# EAGLE board SAME70-XPLD (EAGLE 9.2.2), part 1 of 8
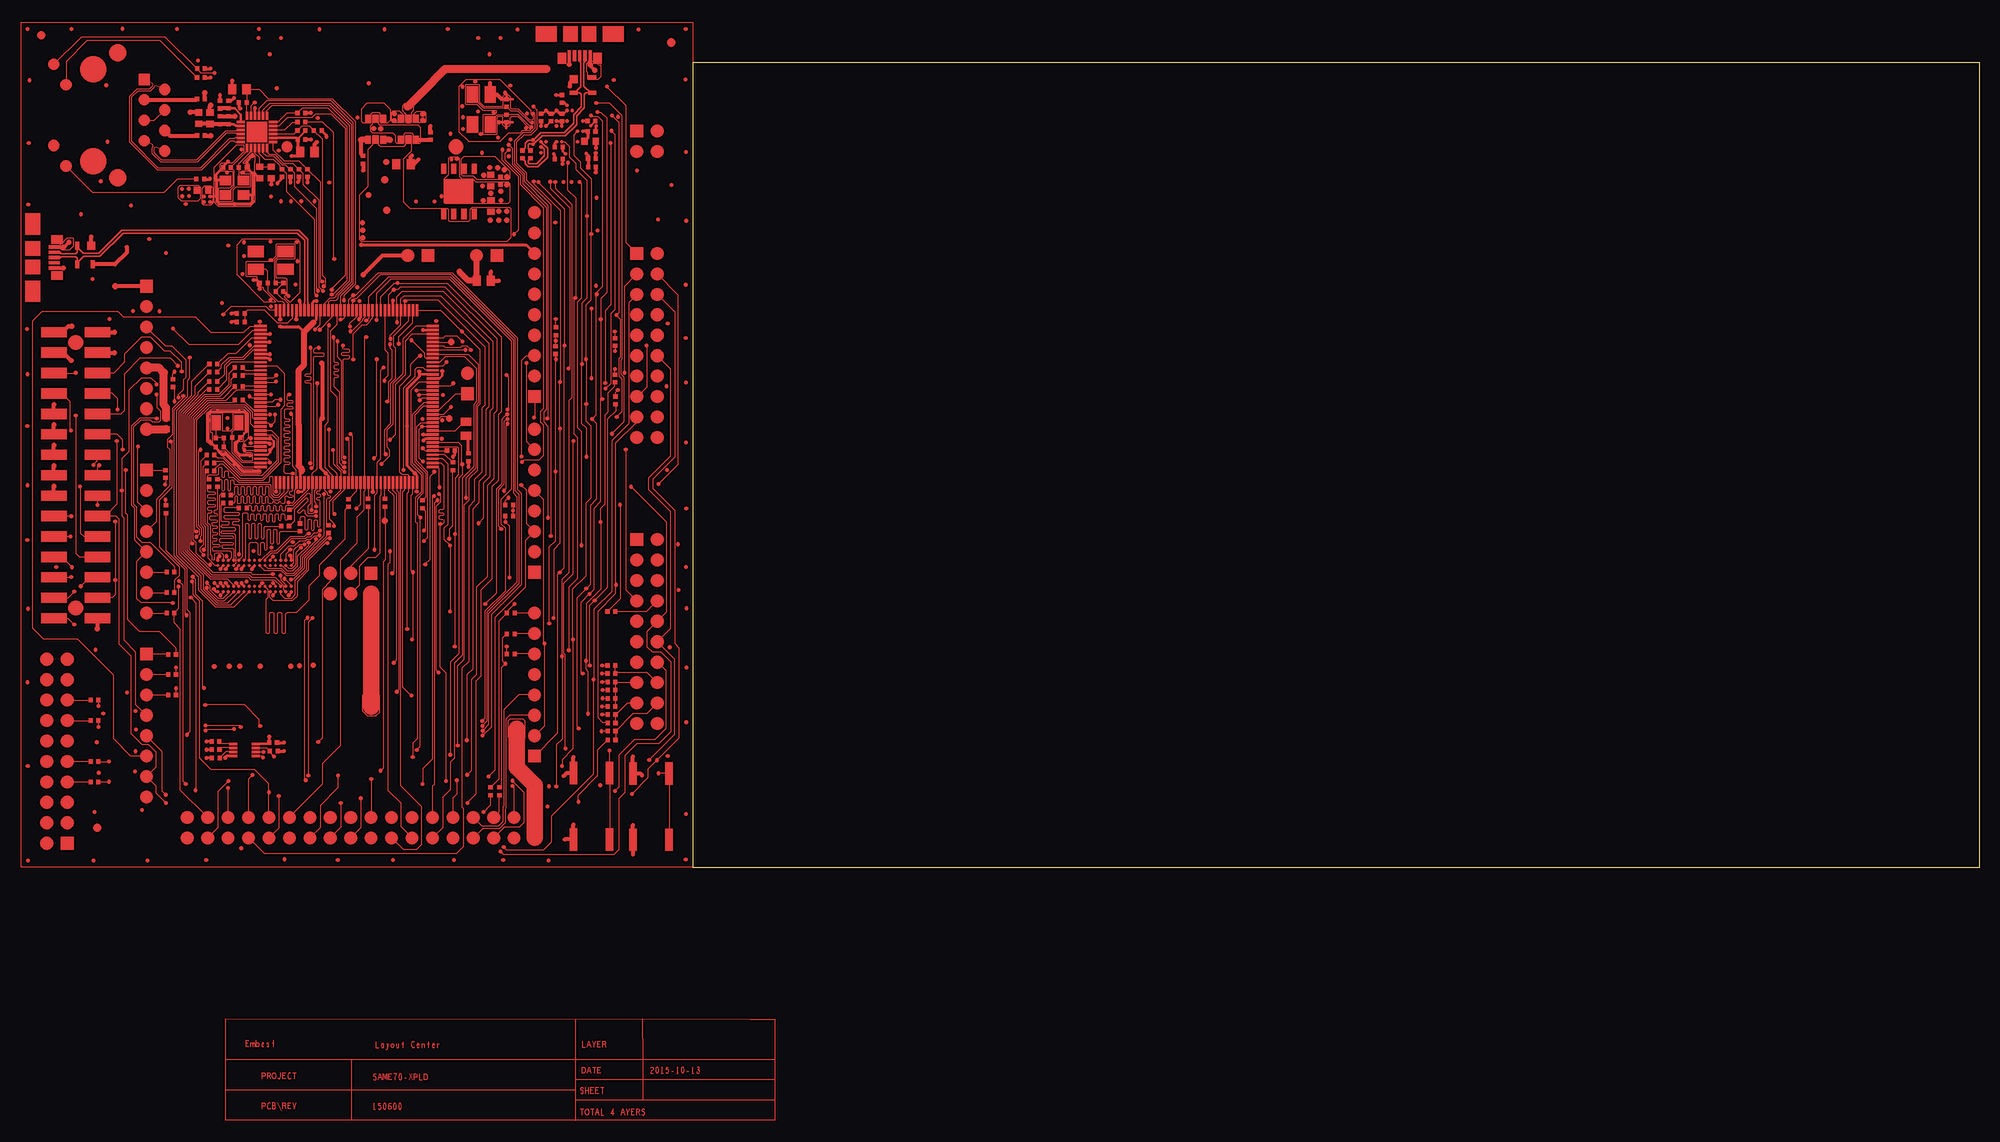
[diagram p0: board, top side]
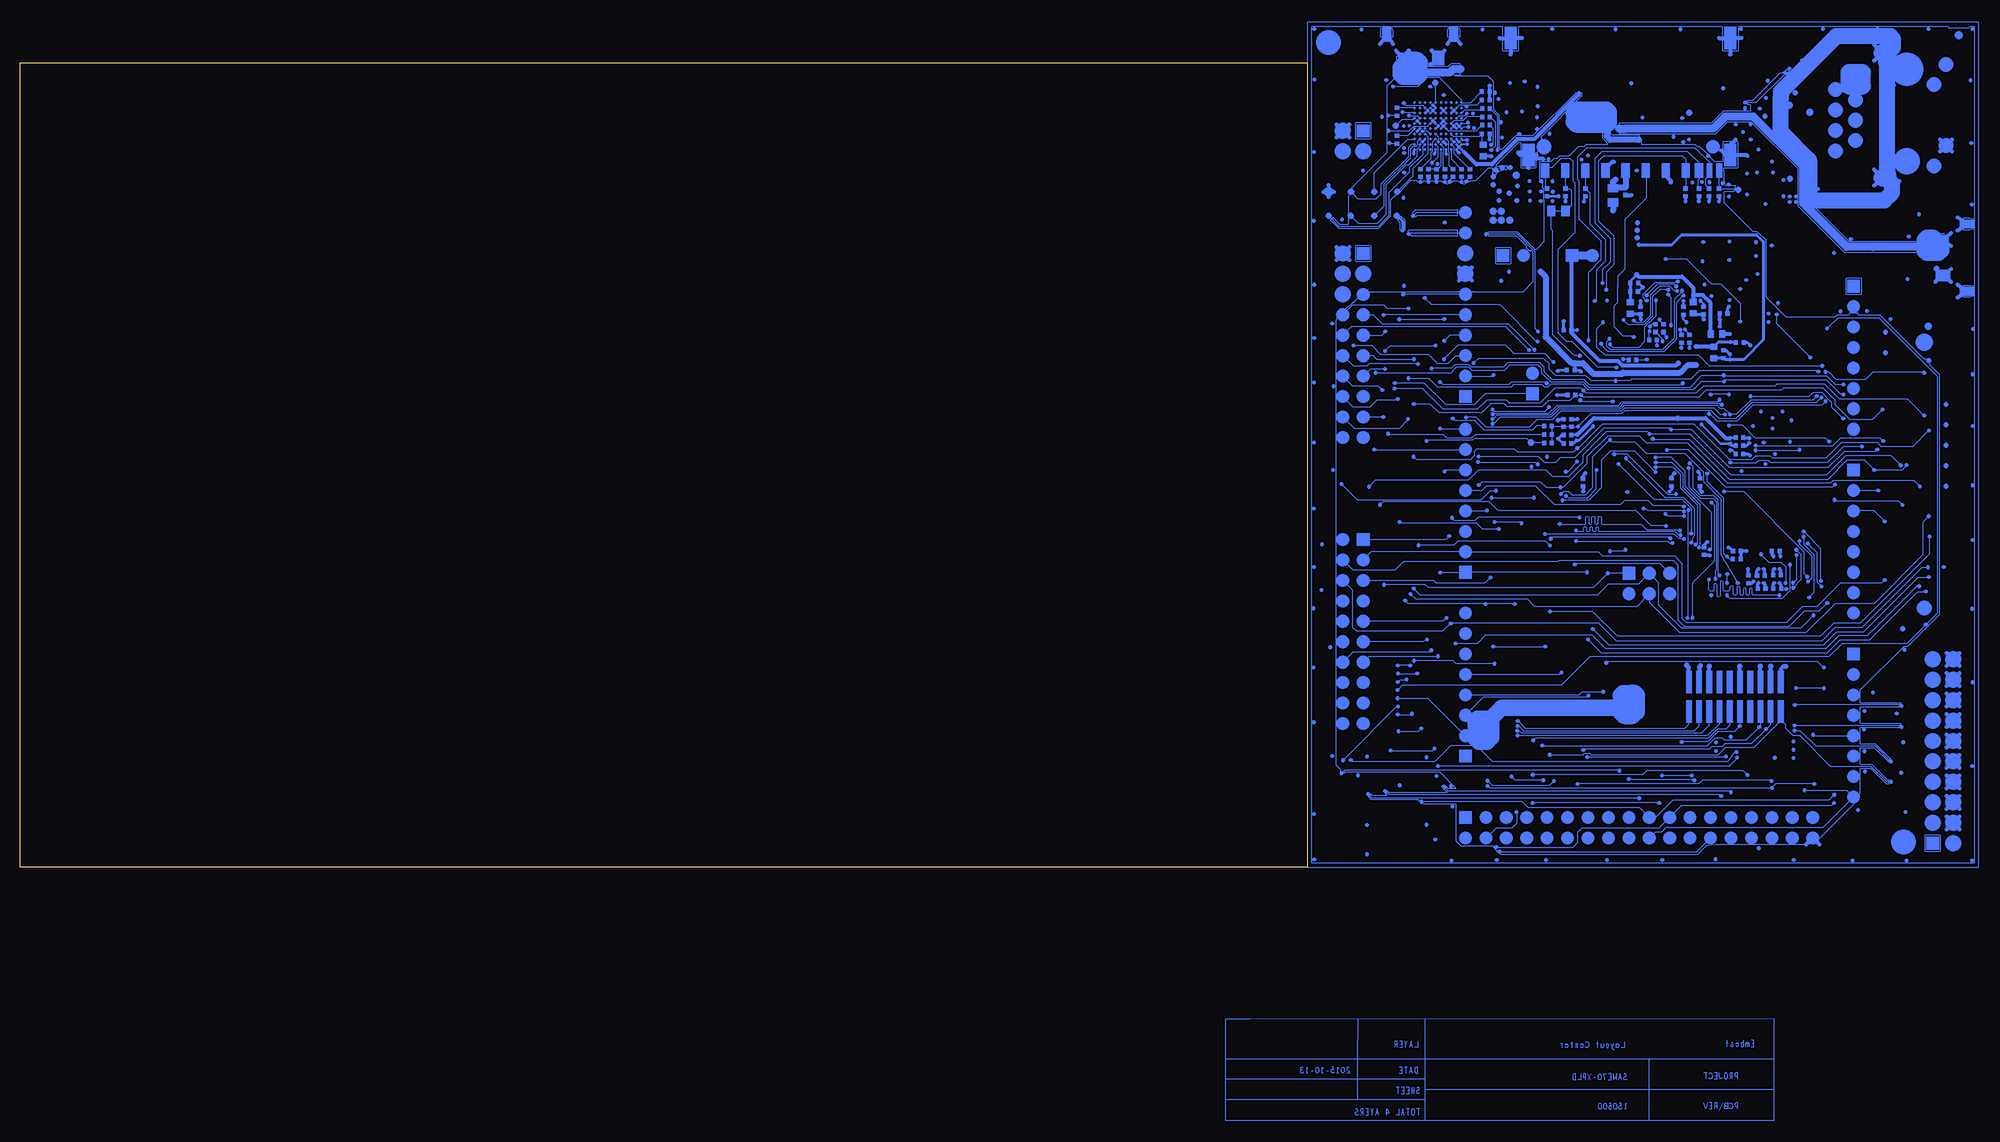
[diagram p1: board, bottom side, seen from below]

Size 160 x 100 mm. Coordinates in mm from the lower left corner, seen from the top.
Outline: 0,0 160,0 160,100 0,100 0,0
Copper layers (1*16): Top 0.035mm / dielectric 1.5mm / Bottom 0.035mm
Design rules "default": minimum track width 6mil, minimum drill 0.35mm, track to track 6mil, track to pad 6mil, pad to pad 6mil, via to via 6mil, smd to smd 6mil, copper to edge 40mil, drill to drill 6mil, minimum pad ring 10mil, minimum via ring 8mil, stop-mask expansion 4mil, vias tented up to drill 0mil, thermal gap 10mil

## Placement (x,y rotation side)

## Tracks (layer width: path | path; a pad name or v marks a point on that pad's centre or on a via)
S$1
  Top 0: -78.41,76.67 -78.48,76.74
  Bottom 0: -82.99,0.57 -82.99,70.82
S$2
  Top 0: -78.48,76.74 -78.5,76.78
  Bottom 0: -82.99,70.82 -82.96,70.87
S$3
  Top 0: -78.5,76.78
  Bottom 0: -82.96,70.87 -82.85,70.94
S$4
  Top 0: -78.5,76.78 -78.54,76.82
  Bottom 0: -82.85,70.94 -82.82,70.94
S$5
  Top 0: -78.54,76.82
  Bottom 0: -82.82,70.94 -82.81,70.93
S$6
  Top 0: -78.54,76.82 -78.58,76.84
  Bottom 0: -82.81,70.93 -82.46,70.84
S$7
  Top 0: -78.58,76.84
  Bottom 0: -82.46,70.84 -81.64,70.84
S$8
  Top 0: -78.58,76.84 -78.63,76.86
  Bottom 0: -81.64,70.84 -81.64,72.34
S$9
  Top 0: -78.63,76.86 -78.72,76.86
  Bottom 0: -81.64,72.34 -82.46,72.34
S$10
  Top 0: -78.72,76.86 -78.76,76.88
  Bottom 0: -82.46,72.34 -82.81,72.25
S$11
  Top 0: -78.76,76.88 -78.83,76.95
  Bottom 0: -82.81,72.25 -82.82,72.25
S$12
  Top 0: -78.83,76.95 -78.85,76.99
  Bottom 0: -82.82,72.25 -82.85,72.25
S$13
  Top 0: -78.85,76.99 -78.85,77.13
  Bottom 0: -82.85,72.25 -82.96,72.31
S$14
  Top 0: -78.85,77.13 -78.83,77.17
  Bottom 0: -82.96,72.31 -82.99,72.37
S$15
  Top 0: -78.83,77.17 -78.74,77.26
  Bottom 0: -82.99,72.37 -82.99,79.17
S$16
  Top 0: -78.74,77.26 -78.72,77.27
  Bottom 0: -82.99,79.17 -82.96,79.22
S$17
  Top 0: -78.72,77.27
  Bottom 0: -82.96,79.22 -82.85,79.28
S$18
  Top 0: -78.72,77.27 -78.17,77.82
  Bottom 0: -82.85,79.28 -82.82,79.29
S$19
  Top 0: -78.17,77.82 -78.17,77.83
  Bottom 0: -82.82,79.29 -82.81,79.28
S$20
  Top 0: -78.17,77.83 -78.16,77.85
  Bottom 0: -82.81,79.28 -82.46,79.19
S$21
  Top 0: -78.16,77.85 -77.77,78.23
  Bottom 0: -82.46,79.19 -81.64,79.19
S$22
  Top 0: -77.77,78.23 -77.72,78.25
  Bottom 0: -81.64,79.19 -81.64,80.69
S$23
  Top 0: -77.72,78.25 -77.15,78.25
  Bottom 0: -81.64,80.69 -82.46,80.69
S$24
  Top 0: -77.15,78.25 -77.1,78.23
  Bottom 0: -82.46,80.69 -82.81,80.6
S$25
  Top 0: -77.1,78.23 -77.04,78.17
  Bottom 0: -82.81,80.6 -82.82,80.6
S$26
  Top 0: -77.04,78.17 -77.02,78.12
  Bottom 0: -82.82,80.6 -82.85,80.6
S$27
  Top 0: -77.02,78.12 -77.02,77.22
  Bottom 0: -82.85,80.6 -82.96,80.66
S$28
  Top 0: -77.02,77.22 -77.04,77.17
  Bottom 0: -82.96,80.66 -82.99,80.72
S$29
  Top 0: -77.04,77.17 -77.54,76.67
  Bottom 0: -82.99,80.72 -82.99,104.43
S$30
  Top 0: -77.54,76.67 -77.58,76.65
  Bottom 0: -82.99,104.43 -82.93,104.49
S$31
  Top 0: -77.58,76.65 -78.37,76.65
  Bottom 0: -82.93,104.49 -82.33,104.49
S$32
  Top 0: -78.37,76.65 -78.41,76.67
  Bottom 0: -82.33,104.49 -82.28,104.46
S$33
  Top 0: -55.25,53.5 -55.31,53.3
  Bottom 0: -82.28,104.46 -82.22,104.34
S$34
  Top 0: -55.31,53.3 -55.31,53.29
  Bottom 0: -82.22,104.34 -82.22,104.3
S$35
  Top 0: -55.31,53.29 -55.32,53.26
  Bottom 0: -82.22,104.3 -82.23,104.29
S$36
  Top 0: -55.32,53.26 -55.8,52.78
  Bottom 0: -82.23,104.29 -79.78,104.29
S$37
  Top 0: -55.8,52.78 -55.82,52.77
  Bottom 0: -79.78,104.29 -79.79,104.3
S$38
  Top 0: -55.82,52.77 -55.83,52.77
  Bottom 0: -79.79,104.3 -79.79,104.34
S$39
  Top 0: -55.83,52.77 -56,52.18
  Bottom 0: -79.79,104.34 -79.73,104.46
S$40
  Top 0: -56,52.18 -55.99,52.17
  Bottom 0: -79.73,104.46 -79.67,104.49
S$41
  Top 0: -55.99,52.17 -55.98,52.15
  Bottom 0: -79.67,104.49 -53.63,104.49
S$42
  Top 0: -55.98,52.15 -55.98,52.08
  Bottom 0: -53.63,104.49 -53.56,104.43
S$43
  Top 0: -55.98,52.08 -55.99,52.06
  Bottom 0: -53.56,104.43 -53.56,101.51
S$44
  Top 0: -55.99,52.06 -55.99,52.05
  Bottom 0: -53.56,101.51 -53.5,101.44
S$45
  Top 0: -55.99,52.05 -55.52,51.53
  Bottom 0: -53.5,101.44 -51.7,101.44
S$46
  Top 0: -55.52,51.53 -55.48,51.54
  Bottom 0: -51.7,101.44 -51.63,101.51
S$47
  Top 0: -55.48,51.54 -54.94,51.54
  Bottom 0: -51.63,101.51 -51.63,104.43
S$48
  Top 0: -54.94,51.54 -54.9,51.52
  Bottom 0: -51.63,104.43 -51.57,104.49
S$49
  Top 0: -54.9,51.52 -54.79,51.41
  Bottom 0: -51.57,104.49 -26.33,104.49
S$50
  Top 0: -54.79,51.41 -54.77,51.37
  Bottom 0: -26.33,104.49 -26.26,104.43
S$51
  Top 0: -54.77,51.37 -54.77,50.54
  Bottom 0: -26.26,104.43 -26.26,101.51
S$52
  Top 0: -54.77,50.54 -54.83,50.47
  Bottom 0: -26.26,101.51 -26.2,101.44
S$53
  Top 0: -54.83,50.47 -55.89,50.47
  Bottom 0: -26.2,101.44 -24.4,101.44
S$54
  Top 0: -55.89,50.47 -55.93,50.49
  Bottom 0: -24.4,101.44 -24.33,101.51
S$55
  Top 0: -55.93,50.49 -57,51.56
  Bottom 0: -24.33,101.51 -24.33,104.43
S$56
  Top 0: -57,51.56 -57.02,51.6
  Bottom 0: -24.33,104.43 -24.27,104.49
S$57
  Top 0: -57.02,51.6 -57.02,52.83
  Bottom 0: -24.27,104.49 -19,104.49
S$58
  Top 0: -57.02,52.83 -56.95,52.9
  Bottom 0: -19,104.49 -18.95,104.46
S$59
  Top 0: -56.95,52.9 -56.84,52.9
  Bottom 0: -18.95,104.46 -18.89,104.35
S$60
  Top 0: -56.84,52.9 -56.78,52.96
  Bottom 0: -18.89,104.35 -18.88,104.32
S$61
  Top 0: -56.78,52.96
  Bottom 0: -18.88,104.32 -18.89,104.31
S$62
  Top 0: -56.78,52.96 -55.95,52.96
  Bottom 0: -18.89,104.31 -18.98,103.96
S$63
  Top 0: -55.95,52.96 -55.91,52.98
  Bottom 0: -18.98,103.96 -18.98,103.14
S$64
  Top 0: -55.91,52.98 -55.82,53.06
  Bottom 0: -18.98,103.14 -17.48,103.14
S$65
  Top 0: -55.82,53.06 -55.8,53.11
  Bottom 0: -17.48,103.14 -17.48,103.96
S$66
  Top 0: -55.8,53.11 -55.8,54.02
  Bottom 0: -17.48,103.96 -17.57,104.31
S$67
  Top 0: -55.8,54.02 -55.74,54.08
  Bottom 0: -17.57,104.31 -17.57,104.32
S$68
  Top 0: -55.74,54.08 -55.73,54.08
  Bottom 0: -17.57,104.32 -17.57,104.35
S$69
  Top 0: -55.73,54.08 -55.66,54.14
  Bottom 0: -17.57,104.35 -17.51,104.46
S$70
  Top 0: -55.66,54.14 -55.66,56.33
  Bottom 0: -17.51,104.46 -17.45,104.49
S$71
  Top 0: -55.66,56.33 -55.73,56.39
  Bottom 0: -17.45,104.49 -10.65,104.49
S$72
  Top 0: -55.73,56.39 -57.15,56.39
  Bottom 0: -10.65,104.49 -10.6,104.46
S$73
  Top 0: -57.15,56.39 -57.21,56.33
  Bottom 0: -10.6,104.46 -10.54,104.35
S$74
  Top 0: -57.21,56.33 -57.21,54.45
  Bottom 0: -10.54,104.35 -10.53,104.32
S$75
  Top 0: -57.21,54.45 -57.23,54.41
  Bottom 0: -10.53,104.32 -10.54,104.31
S$76
  Top 0: -57.23,54.41 -57.41,54.22
  Bottom 0: -10.54,104.31 -10.63,103.96
S$77
  Top 0: -57.41,54.22 -57.46,54.2
  Bottom 0: -10.63,103.96 -10.63,103.14
S$78
  Top 0: -57.46,54.2 -58.37,54.2
  Bottom 0: -10.63,103.14 -9.13,103.14
S$79
  Top 0: -58.37,54.2 -58.42,54.22
  Bottom 0: -9.13,103.14 -9.13,103.96
S$80
  Top 0: -58.42,54.22 -58.44,54.25
  Bottom 0: -9.13,103.96 -9.22,104.31
S$81
  Top 0: -58.44,54.25 -58.46,54.29
  Bottom 0: -9.22,104.31 -9.22,104.32
S$82
  Top 0: -58.46,54.29 -58.46,56.33
  Bottom 0: -9.22,104.32 -9.22,104.35
S$83
  Top 0: -58.46,56.33 -58.52,56.39
  Bottom 0: -9.22,104.35 -9.16,104.46
S$84
  Top 0: -58.52,56.39 -59.95,56.39
  Bottom 0: -9.16,104.46 -9.1,104.49
S$85
  Top 0: -59.95,56.39 -60.01,56.33
  Bottom 0: -9.1,104.49 -0.57,104.49
S$86
  Top 0: -60.01,56.33 -60.01,54.14
  Bottom 0: -0.57,104.49 -0.51,104.43
S$87
  Top 0: -60.01,54.14 -59.95,54.08
  Bottom 0: -0.51,104.43 -0.51,0.57
S$88
  Top 0: -59.95,54.08 -59.81,54.08
  Bottom 0: -0.51,0.57 -0.57,0.51
S$89
  Top 0: -59.81,54.08 -59.75,54.02
  Bottom 0: -0.57,0.51 -82.93,0.51
S$90
  Top 0: -59.75,54.02 -59.75,53.84
  Bottom 0: -82.93,0.51 -82.99,0.57
S$91
  Top 0: -59.75,53.84
  Bottom 0: -13.42,81.66 -13.05,81.29
S$92
  Top 0: -59.75,53.84 -59.75,52.88
  Bottom 0: -13.05,81.29 -13.04,81.29
S$93
  Top 0: -59.75,52.88
  Bottom 0: -13.04,81.29 -13.5,80.83
S$94
  Top 0: -59.75,52.88 -59.75,52.53
  Bottom 0: -13.5,80.83 -13.5,80.84
S$95
  Top 0: -59.75,52.53 -59.81,52.47
  Bottom 0: -13.5,80.84 -13.68,81.02
S$96
  Top 0: -59.81,52.47 -59.95,52.47
  Bottom 0: -13.68,81.02 -13.73,81.04
S$97
  Top 0: -59.95,52.47 -60,52.48
  Bottom 0: -13.73,81.04 -18.69,81.04
S$98
  Top 0: -60,52.48 -60.4,52.88
  Bottom 0: -18.69,81.04 -18.75,81
S$99
  Top 0: -60.4,52.88 -60.41,52.93
  Bottom 0: -18.75,81 -18.75,81.72
S$100
  Top 0: -60.41,52.93 -60.41,56.37
  Bottom 0: -18.75,81.72 -18.69,81.68
S$101
  Top 0: -60.41,56.37 -60.4,56.42
  Bottom 0: -18.69,81.68 -13.47,81.68
S$102
  Top 0: -60.4,56.42 -59.87,56.94
  Bottom 0: -13.47,81.68 -13.42,81.66
S$103
  Top 0: -59.87,56.94 -59.82,56.96
  Bottom 0: -12.19,79.23 -12.19,80.37
S$104
  Top 0: -59.82,56.96 -55.87,56.96
  Bottom 0: -12.19,80.37 -12.18,80.42
S$105
  Top 0: -55.87,56.96 -55.82,56.94
  Bottom 0: -12.18,80.42 -11.72,80.87
S$106
  Top 0: -55.82,56.94 -55.27,56.39
  Bottom 0: -11.72,80.87 -11.71,80.9
S$107
  Top 0: -55.27,56.39 -55.25,56.34
  Bottom 0: -11.71,80.9 -11.72,80.91
S$108
  Top 0: -55.25,56.34 -55.25,55.1
  Bottom 0: -11.72,80.91 -11.2,80.39
S$109
  Top 0: -55.25,55.1 -55.24,55.09
  Bottom 0: -11.2,80.39 -11.21,80.39
S$110
  Top 0: -55.24,55.09 -55.24,53.53
  Bottom 0: -11.21,80.39 -11.24,80.39
S$111
  Top 0: -55.24,53.53 -55.25,53.5
  Bottom 0: -11.24,80.39 -11.49,80.13
S$112
  Top 0: -59.73,82.45 -59.91,82.27
  Bottom 0: -11.49,80.13 -11.51,80.09
S$113
  Top 0: -59.91,82.27 -59.96,82.25
  Bottom 0: -11.51,80.09 -11.51,79.23
S$114
  Top 0: -59.96,82.25 -60.75,82.25
  Bottom 0: -11.51,79.23
S$115
  Top 0: -60.75,82.25 -60.79,82.27
  Bottom 0: -11.51,79.23 -12.2,79.23
S$116
  Top 0: -60.79,82.27 -61,82.47
  Bottom 0: -12.2,79.23 -12.19,79.23
S$117
  Top 0: -61,82.47 -61.01,82.51
  Bottom 0: -12.61,79.12 -12.51,79.02
S$118
  Top 0: -61.01,82.51 -61.01,84.36
  Bottom 0: -12.51,79.02 -12.49,79.02
S$119
  Top 0: -61.01,84.36 -61,84.41
  Bottom 0: -12.49,79.02 -12.91,78.48
S$120
  Top 0: -61,84.41 -60.76,84.65
  Bottom 0: -12.91,78.48 -12.96,78.5
S$121
  Top 0: -60.76,84.65 -60.71,84.67
  Bottom 0: -12.96,78.5 -18.69,78.5
S$122
  Top 0: -60.71,84.67 -59.91,84.67
  Bottom 0: -18.69,78.5 -18.75,78.46
S$123
  Top 0: -59.91,84.67 -59.86,84.65
  Bottom 0: -18.75,78.46 -18.75,79.18
S$124
  Top 0: -59.86,84.65 -59.73,84.51
  Bottom 0: -18.75,79.18 -18.69,79.14
S$125
  Top 0: -59.73,84.51 -59.71,84.47
  Bottom 0: -18.69,79.14 -12.65,79.14
S$126
  Top 0: -59.71,84.47 -59.71,82.49
  Bottom 0: -12.65,79.14 -12.61,79.12
S$127
  Top 0: -59.71,82.49 -59.73,82.45
  Bottom 0: -78.7,3.96 -76.84,3.96
S$128
  Top 0: -61.45,84.77 -61.28,84.59
  Bottom 0: -76.84,3.96 -76.78,3.9
S$129
  Top 0: -61.28,84.59 -61.26,84.55
  Bottom 0: -76.78,3.9 -76.78,2.04
S$130
  Top 0: -61.26,84.55 -61.26,83.05
  Bottom 0: -76.78,2.04 -76.84,1.98
S$131
  Top 0: -61.26,83.05 -61.28,83.01
  Bottom 0: -76.84,1.98 -78.7,1.98
S$132
  Top 0: -61.28,83.01 -61.48,82.81
  Bottom 0: -78.7,1.98 -78.76,2.04
S$133
  Top 0: -61.48,82.81 -61.52,82.79
  Bottom 0: -78.76,2.04 -78.76,3.9
S$134
  Top 0: -61.52,82.79 -63.55,82.79
  Bottom 0: -78.76,3.9 -78.7,3.96
S$135
  Top 0: -63.55,82.79 -63.6,82.81
  Bottom 0: -68.86,73.2 -67,73.2
S$136
  Top 0: -63.6,82.81 -63.97,83.17
  Bottom 0: -67,73.2 -66.94,73.14
S$137
  Top 0: -63.97,83.17 -63.99,83.22
  Bottom 0: -66.94,73.14 -66.94,71.28
S$138
  Top 0: -63.99,83.22 -63.99,84.47
  Bottom 0: -66.94,71.28 -67,71.22
S$139
  Top 0: -63.99,84.47 -63.97,84.51
  Bottom 0: -67,71.22 -68.86,71.22
S$140
  Top 0: -63.97,84.51 -63.71,84.77
  Bottom 0: -68.86,71.22 -68.92,71.28
S$141
  Top 0: -63.71,84.77 -63.67,84.79
  Bottom 0: -68.92,71.28 -68.92,73.14
S$142
  Top 0: -63.67,84.79 -61.5,84.79
  Bottom 0: -68.92,73.14 -68.86,73.2
S$143
  Top 0: -61.5,84.79 -61.45,84.77
  Bottom 0: -25.28,77.01 -23.43,77.01
S$144
  Top 0: -56.13,48.88 -58.28,51.04
  Bottom 0: -23.43,77.01 -23.37,76.94
S$145
  Top 0: -58.28,51.04 -58.33,51.06
  Bottom 0: -23.37,76.94 -23.37,75.09
S$146
  Top 0: -58.33,51.06 -58.48,51.06
  Bottom 0: -23.37,75.09 -23.43,75.03
S$147
  Top 0: -58.48,51.06 -58.52,51.07
  Bottom 0: -23.43,75.03 -25.28,75.03
S$148
  Top 0: -58.52,51.07 -59,51.55
  Bottom 0: -25.28,75.03 -25.35,75.09
S$149
  Top 0: -59,51.55 -59.02,51.59
  Bottom 0: -25.35,75.09 -25.35,76.94
S$150
  Top 0: -59.02,51.59 -59.02,51.67
  Bottom 0: -25.35,76.94 -25.28,77.01
S$151
  Top 0: -59.02,51.67 -58.95,51.73
  Bottom 0: -7.9,77.26 -6.04,77.26
S$152
  Top 0: -58.95,51.73 -58.79,51.73
  Bottom 0: -6.04,77.26 -5.98,77.2
S$153
  Top 0: -58.79,51.73 -58.18,51.73
  Bottom 0: -5.98,77.2 -5.98,75.34
S$154
  Top 0: -58.18,51.73 -58.14,51.72
  Bottom 0: -5.98,75.34 -6.04,75.28
S$155
  Top 0: -58.14,51.72 -55.98,49.56
  Bottom 0: -6.04,75.28 -7.9,75.28
S$156
  Top 0: -55.98,49.56 -55.94,49.54
  Bottom 0: -7.9,75.28 -7.96,75.34
S$157
  Top 0: -55.94,49.54 -54.79,49.54
  Bottom 0: -7.96,75.34 -7.96,77.2
S$158
  Top 0: -54.79,49.54 -54.73,49.48
  Bottom 0: -7.96,77.2 -7.9,77.26
S$159
  Top 0: -54.73,49.48 -54.71,49.43
  Bottom 0: -7.9,92.5 -6.04,92.5
S$160
  Top 0: -54.71,49.43 -54.68,49.4
  Bottom 0: -6.04,92.5 -5.98,92.44
S$161
  Top 0: -54.68,49.4 -53.81,49.4
  Bottom 0: -5.98,92.44 -5.98,90.58
S$162
  Top 0: -53.81,49.4 -53.77,49.38
  Bottom 0: -5.98,90.58 -6.04,90.52
S$163
  Top 0: -53.77,49.38 -53.72,49.34
  Bottom 0: -6.04,90.52 -7.9,90.52
S$164
  Top 0: -53.72,49.34 -53.7,49.29
  Bottom 0: -7.9,90.52 -7.96,90.58
S$165
  Top 0: -53.7,49.29 -53.7,49.03
  Bottom 0: -7.96,90.58 -7.96,92.44
S$166
  Top 0: -53.7,49.03 -53.72,48.99
  Bottom 0: -7.96,92.44 -7.9,92.5
S$167
  Top 0: -53.72,48.99 -53.83,48.88
  Bottom 0: -3.95,79.41 -8.87,79.41
S$168
  Top 0: -53.83,48.88 -53.88,48.86
  Bottom 0: -8.87,79.41 -8.91,79.43
S$169
  Top 0: -53.88,48.86 -56.08,48.86
  Bottom 0: -8.91,79.43 -10.36,80.87
S$170
  Top 0: -56.08,48.86 -56.13,48.88
  Bottom 0: -10.36,80.87 -10.38,80.92
S$171
  Top 0: -50.09,70.21
  Bottom 0: -10.38,80.92 -10.38,82.91
S$172
  Top 0: -50.09,70.21 -50.13,70.23
  Bottom 0: -10.38,82.91 -10.39,82.95
S$173
  Top 0: -50.13,70.23 -50.68,70.78
  Bottom 0: -10.39,82.95 -10.87,83.43
S$174
  Top 0: -50.68,70.78 -50.7,70.82
  Bottom 0: -10.87,83.43 -10.91,83.43
S$175
  Top 0: -50.7,70.82 -50.7,71
  Bottom 0: -10.91,83.43 -10.93,83.42
S$176
  Top 0: -50.7,71 -50.68,71.05
  Bottom 0: -10.93,83.42 -11.74,84.14
S$177
  Top 0: -50.68,71.05 -50.44,71.29
  Bottom 0: -11.74,84.14 -11.74,84.16
S$178
  Top 0: -50.44,71.29 -50.42,71.33
  Bottom 0: -11.74,84.16 -11.74,84.19
S$179
  Top 0: -50.42,71.33 -50.42,72.13
  Bottom 0: -11.74,84.19 -12.9,85.35
S$180
  Top 0: -50.42,72.13
  Bottom 0: -12.9,85.35 -12.95,85.37
S$181
  Top 0: -50.42,72.13 -50.42,73.06
  Bottom 0: -12.95,85.37 -13.56,85.37
S$182
  Top 0: -50.42,73.06 -50.46,73.1
  Bottom 0: -13.56,85.37 -13.57,85.36
S$183
  Top 0: -50.46,73.1 -50.47,73.1
  Bottom 0: -13.57,85.36 -13.62,85.34
S$184
  Top 0: -50.47,73.1 -50.58,73.21
  Bottom 0: -13.62,85.34
S$185
  Top 0: -50.58,73.21 -50.62,73.23
  Bottom 0: -13.62,85.34 -13.71,85.24
S$186
  Top 0: -50.62,73.23 -51.7,73.23
  Bottom 0: -13.71,85.24 -13.72,85.22
S$187
  Top 0: -51.7,73.23 -51.75,73.25
  Bottom 0: -13.72,85.22 -13.72,85.2
S$188
  Top 0: -51.75,73.25 -51.76,73.25
  Bottom 0: -13.72,85.2 -14.43,85.2
S$189
  Top 0: -51.76,73.25 -51.76,73.28
  Bottom 0: -14.43,85.2 -14.43,85.22
S$190
  Top 0: -51.76,73.28 -51.76,75.39
  Bottom 0: -14.43,85.22 -14.44,85.24
S$191
  Top 0: -51.76,75.39 -51.75,75.43
  Bottom 0: -14.44,85.24 -14.51,85.32
S$192
  Top 0: -51.75,75.43 -51.58,75.6
  Bottom 0: -14.51,85.32 -14.55,85.34
S$193
  Top 0: -51.58,75.6 -51.53,75.62
  Bottom 0: -14.55,85.34 -16.61,85.34
S$194
  Top 0: -51.53,75.62 -49.48,75.62
  Bottom 0: -16.61,85.34 -16.66,85.32
S$195
  Top 0: -49.48,75.62 -49.42,75.68
  Bottom 0: -16.66,85.32 -16.73,85.24
S$196
  Top 0: -49.42,75.68 -49.42,77.36
  Bottom 0: -16.73,85.24 -16.74,85.22
S$197
  Top 0: -49.42,77.36 -49.48,77.42
  Bottom 0: -16.74,85.22 -16.74,85.2
S$198
  Top 0: -49.48,77.42 -51.8,77.42
  Bottom 0: -16.74,85.2 -17.34,84.92
S$199
  Top 0: -51.8,77.42 -51.86,77.36
  Bottom 0: -17.34,84.92 -17.35,84.93
S$200
  Top 0: -51.86,77.36 -51.86,75.96
  Bottom 0: -17.35,84.93 -17.37,84.94
S$201
  Top 0: -51.86,75.96 -51.88,75.91
  Bottom 0: -17.37,84.94 -17.47,84.94
S$202
  Top 0: -51.88,75.91 -52.18,75.61
  Bottom 0: -17.47,84.94 -17.5,84.93
S$203
  Top 0: -52.18,75.61 -52.2,75.57
  Bottom 0: -17.5,84.93 -17.5,84.92
S$204
  Top 0: -52.2,75.57 -52.2,75.28
  Bottom 0: -17.5,84.92 -18.09,85.21
S$205
  Top 0: -52.2,75.28 -52.26,75.22
  Bottom 0: -18.09,85.21 -18.09,85.22
S$206
  Top 0: -52.26,75.22 -53.12,75.22
  Bottom 0: -18.09,85.22 -18.1,85.25
S$207
  Top 0: -53.12,75.22
  Bottom 0: -18.1,85.25 -18.17,85.32
S$208
  Top 0: -53.12,75.22 -55.5,75.22
  Bottom 0: -18.17,85.32 -18.21,85.34
S$209
  Top 0: -55.5,75.22 -55.56,75.16
  Bottom 0: -18.21,85.34 -18.69,85.34
S$210
  Top 0: -55.56,75.16 -55.56,73.48
  Bottom 0: -18.69,85.34 -18.73,85.32
S$211
  Top 0: -55.56,73.48 -55.5,73.42
  Bottom 0: -18.73,85.32 -18.8,85.24
S$212
  Top 0: -55.5,73.42 -54.27,73.42
  Bottom 0: -18.8,85.24 -18.81,85.22
S$213
  Top 0: -54.27,73.42 -54.21,73.35
  Bottom 0: -18.81,85.22 -18.81,85.2
S$214
  Top 0: -54.21,73.35 -54.21,72.35
  Bottom 0: -18.81,85.2 -19.41,84.92
S$215
  Top 0: -54.21,72.35 -54.19,72.3
  Bottom 0: -19.41,84.92
S$216
  Top 0: -54.19,72.3 -54.04,72.15
  Bottom 0: -19.41,84.92 -19.43,84.93
S$217
  Top 0: -54.04,72.15 -53.99,72.13
  Bottom 0: -19.43,84.93 -19.54,84.94
S$218
  Top 0: -53.99,72.13 -53.55,72.13
  Bottom 0: -19.54,84.94 -19.56,84.93
S$219
  Top 0: -53.55,72.13 -53.55,72.14
  Bottom 0: -19.56,84.93 -19.57,84.93
S$220
  Top 0: -53.55,72.14 -53.42,72.01
  Bottom 0: -19.57,84.93 -20.13,85.21
S$221
  Top 0: -53.42,72.01 -53.4,71.96
  Bottom 0: -20.13,85.21 -20.13,85.23
S$222
  Top 0: -53.4,71.96 -53.4,71.87
  Bottom 0: -20.13,85.23 -20.14,85.25
S$223
  Top 0: -53.4,71.87 -53.38,71.82
  Bottom 0: -20.14,85.25 -20.21,85.32
S$224
  Top 0: -53.38,71.82 -53.08,71.52
  Bottom 0: -20.21,85.32 -20.25,85.34
S$225
  Top 0: -53.08,71.52 -53.08,71.5
  Bottom 0: -20.25,85.34 -20.72,85.34
S$226
  Top 0: -53.08,71.5 -51.89,70.32
  Bottom 0: -20.72,85.34 -20.74,85.37
S$227
  Top 0: -51.89,70.32 -51.88,70.25
  Bottom 0: -20.74,85.37 -20.98,85.37
S$228
  Top 0: -51.88,70.25 -51.89,70.23
  Bottom 0: -20.98,85.37 -21.02,85.39
S$229
  Top 0: -51.89,70.23 -51.92,70.21
  Bottom 0: -21.02,85.39 -22.57,86.94
S$230
  Top 0: -51.92,70.21 -53.24,70.21
  Bottom 0: -22.57,86.94 -22.62,86.95
S$231
  Top 0: -53.24,70.21 -53.28,70.23
  Bottom 0: -22.62,86.95 -22.88,86.95
S$232
  Top 0: -53.28,70.23 -56.6,73.54
  Bottom 0: -22.88,86.95 -22.93,86.93
S$233
  Top 0: -56.6,73.54 -56.62,73.59
  Bottom 0: -22.93,86.93 -23,86.84
S$234
  Top 0: -56.62,73.59 -56.62,77.39
  Bottom 0: -23,86.84 -23.01,86.81
S$235
  Top 0: -56.62,77.39 -56.6,77.44
  Bottom 0: -23.01,86.81 -23.01,86.8
S$236
  Top 0: -56.6,77.44 -55.95,78.08
  Bottom 0: -23.01,86.8 -23.08,86.44
S$237
  Top 0: -55.95,78.08 -55.91,78.1
  Bottom 0: -23.08,86.44 -23.09,86.42
S$238
  Top 0: -55.91,78.1 -49.23,78.1
  Bottom 0: -23.09,86.42 -23.1,86.39
S$239
  Top 0: -49.23,78.1 -49.19,78.08
  Bottom 0: -23.1,86.39 -23.05,86.26
S$240
  Top 0: -49.19,78.08 -48.87,77.77
  Bottom 0: -23.05,86.26 -23.03,86.24
S$241
  Top 0: -48.87,77.77 -48.85,77.72
  Bottom 0: -23.03,86.24 -23.02,86.24
S$242
  Top 0: -48.85,77.72 -48.85,71.44
  Bottom 0: -23.02,86.24 -23.48,86.08
S$243
  Top 0: -48.85,71.44 -48.87,71.4
  Bottom 0: -23.48,86.08 -23.47,86.09
S$244
  Top 0: -48.87,71.4 -50.04,70.23
  Bottom 0: -23.47,86.09 -23.46,86.12
S$245
  Top 0: -50.04,70.23 -50.09,70.21
  Bottom 0: -23.46,86.12 -23.5,86.25
S$246
  Top 0: -58.98,82.13 -59.46,82.61
  Bottom 0: -23.5,86.25 -23.53,86.28
S$247
  Top 0: -59.46,82.61 -59.48,82.65
  Bottom 0: -23.53,86.28 -23.54,86.28
S$248
  Top 0: -59.48,82.65 -59.48,87.01
  Bottom 0: -23.54,86.28 -23.82,86.52
S$249
  Top 0: -59.48,87.01 -59.46,87.06
  Bottom 0: -23.82,86.52 -23.83,86.54
S$250
  Top 0: -59.46,87.06 -56.76,89.75
  Bottom 0: -23.83,86.54 -23.85,86.56
S$251
  Top 0: -56.76,89.75 -56.71,89.77
  Bottom 0: -23.85,86.56 -23.97,86.59
S$252
  Top 0: -56.71,89.77 -55.87,89.77
  Bottom 0: -23.97,86.59 -24,86.59
S$253
  Top 0: -55.87,89.77 -55.8,89.71
  Bottom 0: -24,86.59 -24.01,86.58
S$254
  Top 0: -55.8,89.71 -55.8,89.03
  Bottom 0: -24.01,86.58 -24.64,86.73
S$255
  Top 0: -55.8,89.03 -55.8,88.96
  Bottom 0: -24.64,86.73 -24.65,86.75
S$256
  Top 0: -55.8,88.96 -55.79,88.95
  Bottom 0: -24.65,86.75 -24.68,86.77
S$257
  Top 0: -55.79,88.95 -55.8,88.92
  Bottom 0: -24.68,86.77 -24.82,86.77
S$258
  Top 0: -55.8,88.92 -57.23,87.49
  Bottom 0: -24.82,86.77 -24.85,86.75
S$259
  Top 0: -57.23,87.49 -57.28,87.47
  Bottom 0: -24.85,86.75 -24.86,86.74
S$260
  Top 0: -57.28,87.47 -57.88,87.47
  Bottom 0: -24.86,86.74 -24.85,87.17
S$261
  Top 0: -57.88,87.47 -57.88,87.46
  Bottom 0: -24.85,87.17 -24.84,87.15
S$262
  Top 0: -57.88,87.46 -58.61,87.46
  Bottom 0: -24.84,87.15 -24.81,87.13
S$263
  Top 0: -58.61,87.46 -58.66,87.44
  Bottom 0: -24.81,87.13 -24.66,87.13
S$264
  Top 0: -58.66,87.44 -58.8,87.3
  Bottom 0: -24.66,87.13 -24.63,87.14
S$265
  Top 0: -58.8,87.3 -58.81,87.26
  Bottom 0: -24.63,87.14 -24.62,87.16
S$266
  Top 0: -58.81,87.26 -58.81,86.72
  Bottom 0: -24.62,87.16 -23.86,87.11
S$267
  Top 0: -58.81,86.72 -58.8,86.67
  Bottom 0: -23.86,87.11 -23.86,87.09
S$268
  Top 0: -58.8,86.67 -58.67,86.55
  Bottom 0: -23.86,87.09 -23.83,87.07
S$269
  Top 0: -58.67,86.55 -58.63,86.53
  Bottom 0: -23.83,87.07 -23.71,87.04
S$270
  Top 0: -58.63,86.53 -57.91,86.53
  Bottom 0: -23.71,87.04 -23.68,87.04
S$271
  Top 0: -57.91,86.53 -57.9,86.52
  Bottom 0: -23.68,87.04 -23.67,87.05
S$272
  Top 0: -57.9,86.52 -57.86,86.5
  Bottom 0: -23.67,87.05 -23.55,87.11
S$273
  Top 0: -57.86,86.5 -57.28,86.5
  Bottom 0: -23.55,87.11 -23.53,87.11
S$274
  Top 0: -57.28,86.5 -57.23,86.48
  Bottom 0: -23.53,87.11 -23.51,87.14
S$275
  Top 0: -57.23,86.48
  Bottom 0: -23.51,87.14 -23.48,87.26
S$276
  Top 0: -57.23,86.48 -57.22,86.46
  Bottom 0: -23.48,87.26 -23.49,87.32
S$277
  Top 0: -57.22,86.46 -57.22,84.76
  Bottom 0: -23.49,87.32 -26.24,90.07
S$278
  Top 0: -57.22,84.76 -57.23,84.71
  Bottom 0: -26.24,90.07 -26.28,90.09
S$279
  Top 0: -57.23,84.71 -57.57,84.38
  Bottom 0: -26.28,90.09 -26.47,90.09
S$280
  Top 0: -57.57,84.38 -57.62,84.36
  Bottom 0: -26.47,90.09 -26.53,90.02
S$281
  Top 0: -57.62,84.36 -58.92,84.36
  Bottom 0: -26.53,90.02 -26.53,87.01
S$282
  Top 0: -58.92,84.36 -58.98,84.29
  Bottom 0: -26.53,87.01 -26.6,86.94
S$283
  Top 0: -58.98,84.29 -58.98,82.84
  Bottom 0: -26.6,86.94 -28.4,86.94
S$284
  Top 0: -58.98,82.84 -58.92,82.78
  Bottom 0: -28.4,86.94 -28.46,87.01
S$285
  Top 0: -58.92,82.78 -57.22,82.78
  Bottom 0: -28.46,87.01 -28.46,88.71
S$286
  Top 0: -57.22,82.78 -57.16,82.84
  Bottom 0: -28.46,88.71 -28.5,88.77
S$287
  Top 0: -57.16,82.84 -57.16,84.15
  Bottom 0: -28.5,88.77 -28.63,88.82
S$288
  Top 0: -57.16,84.15 -57.14,84.2
  Bottom 0: -28.63,88.82 -28.67,88.82
S$289
  Top 0: -57.14,84.2 -56.77,84.56
  Bottom 0: -28.67,88.82 -28.68,88.8
S$290
  Top 0: -56.77,84.56 -56.73,84.58
  Bottom 0: -28.68,88.8 -29.2,90.58
S$291
  Top 0: -56.73,84.58 -55.02,84.58
  Bottom 0: -29.2,90.58 -29.18,90.58
S$292
  Top 0: -55.02,84.58 -54.96,84.64
  Bottom 0: -29.18,90.58 -29.14,90.59
S$293
  Top 0: -54.96,84.64 -54.96,86.09
  Bottom 0: -29.14,90.59 -29.07,90.72
S$294
  Top 0: -54.96,86.09 -55.02,86.16
  Bottom 0: -29.07,90.72 -29.08,90.8
S$295
  Top 0: -55.02,86.16 -56.15,86.16
  Bottom 0: -29.08,90.8 -34.16,95.87
S$296
  Top 0: -56.15,86.16 -56.22,86.22
  Bottom 0: -34.16,95.87 -34.18,95.92
S$297
  Top 0: -56.22,86.22 -56.22,86.44
  Bottom 0: -34.18,95.92 -34.18,96.22
S$298
  Top 0: -56.22,86.44 -56.15,86.51
  Bottom 0: -34.18,96.22 -33.37,96.25
S$299
  Top 0: -56.15,86.51 -56,86.51
  Bottom 0: -33.37,96.25 -33.37,96.24
S$300
  Top 0: -56,86.51 -55.99,86.51
  Bottom 0: -33.37,96.24 -33.36,96.22
S$301
  Top 0: -55.99,86.51 -55.95,86.53
  Bottom 0: -33.36,96.22 -28.06,90.92
S$302
  Top 0: -55.95,86.53 -55.23,86.53
  Bottom 0: -28.06,90.92 -28.01,90.9
S$303
  Top 0: -55.23,86.53 -55.18,86.55
  Bottom 0: -28.01,90.9 -25.95,90.9
S$304
  Top 0: -55.18,86.55 -55.09,86.64
  Bottom 0: -25.95,90.9 -25.9,90.88
S$305
  Top 0: -55.09,86.64 -55.08,86.68
  Bottom 0: -25.9,90.88 -24.22,89.2
S$306
  Top 0: -55.08,86.68 -55.08,87.26
  Bottom 0: -24.22,89.2 -24.16,89.19
S$307
  Top 0: -55.08,87.26 -55.09,87.3
  Bottom 0: -24.16,89.19 -24.04,89.22
S$308
  Top 0: -55.09,87.3 -55.2,87.42
  Bottom 0: -24.04,89.22 -24.02,89.25
S$309
  Top 0: -55.2,87.42 -55.25,87.43
  Bottom 0: -24.02,89.25 -24.01,89.26
S$310
  Top 0: -55.25,87.43 -55.77,87.43
  Bottom 0: -24.01,89.26 -23.92,89.42
S$311
  Top 0: -55.77,87.43 -55.82,87.45
  Bottom 0: -23.92,89.42 -23.9,89.47
S$312
  Top 0: -55.82,87.45 -55.85,87.49
  Bottom 0: -23.9,89.47 -23.9,93.42
S$313
  Top 0: -55.85,87.49 -55.87,87.53
  Bottom 0: -23.9,93.42 -23.88,93.46
S$314
  Top 0: -55.87,87.53 -55.87,87.64
  Bottom 0: -23.88,93.46 -23.22,94.12
S$315
  Top 0: -55.87,87.64 -55.85,87.68
  Bottom 0: -23.22,94.12 -23.2,94.17
S$316
  Top 0: -55.85,87.68 -54.86,88.68
  Bottom 0: -23.2,94.17 -23.2,97.55
S$317
  Top 0: -54.86,88.68 -54.85,88.69
  Bottom 0: -23.2,97.55 -23.18,97.6
S$318
  Top 0: -54.85,88.69 -54.84,88.69
  Bottom 0: -23.18,97.6 -22.48,98.3
S$319
  Top 0: -54.84,88.69 -54.79,88.71
  Bottom 0: -22.48,98.3 -22.44,98.32
S$320
  Top 0: -54.79,88.71 -54.77,88.72
  Bottom 0: -22.44,98.32 -18.39,98.32
S$321
  Top 0: -54.77,88.72 -54.73,88.71
  Bottom 0: -18.39,98.32 -18.33,98.36
S$322
  Top 0: -54.73,88.71 -54.5,88.47
  Bottom 0: -18.33,98.36 -18.33,98.38
S$323
  Top 0: -54.5,88.47 -54.48,88.43
  Bottom 0: -18.33,98.38 -18.33,98.41
S$324
  Top 0: -54.48,88.43 -54.48,87.63
  Bottom 0: -18.33,98.41 -18.42,98.5
S$325
  Top 0: -54.48,87.63 -54.49,87.63
  Bottom 0: -18.42,98.5 -18.47,98.52
S$326
  Top 0: -54.49,87.63 -54.49,86.46
  Bottom 0: -18.47,98.52 -19.05,98.52
S$327
  Top 0: -54.49,86.46 -54.48,86.46
  Bottom 0: -19.05,98.52 -19.05,99.84
S$328
  Top 0: -54.48,86.46 -54.48,82.66
  Bottom 0: -19.05,99.84 -17.92,99.84
S$329
  Top 0: -54.48,82.66 -54.5,82.62
  Bottom 0: -17.92,99.84 -17.88,99.82
S$330
  Top 0: -54.5,82.62 -54.99,82.13
  Bottom 0: -17.88,99.82 -17.55,99.5
S$331
  Top 0: -54.99,82.13 -55.03,82.11
  Bottom 0: -17.55,99.5 -17.5,99.48
S$332
  Top 0: -55.03,82.11 -58.94,82.11
  Bottom 0: -17.5,99.48 -14.28,99.48
S$333
  Top 0: -58.94,82.11 -58.98,82.13
  Bottom 0: -14.28,99.48 -14.22,99.54
S$334
  Top 0: -40.16,21.64 -40.15,21.64
  Bottom 0: -14.22,99.54 -14.22,100.07
S$335
  Top 0: -40.15,21.64 -39.29,21.64
  Bottom 0: -14.22,100.07 -14.2,100.12
S$336
  Top 0: -39.29,21.64 -39.25,21.62
  Bottom 0: -14.2,100.12 -13.78,100.53
S$337
  Top 0: -39.25,21.62 -38.99,21.36
  Bottom 0: -13.78,100.53 -13.74,100.55
S$338
  Top 0: -38.99,21.36 -38.98,21.32
  Bottom 0: -13.74,100.55 -12.63,100.55
S$339
  Top 0: -38.98,21.32 -38.98,19.22
  Bottom 0: -12.63,100.55 -12.56,100.61
S$340
  Top 0: -38.98,19.22 -38.99,19.18
  Bottom 0: -12.56,100.61 -12.56,100.72
S$341
  Top 0: -38.99,19.18 -39.39,18.78
  Bottom 0: -12.56,100.72 -11.09,100.72
S$342
  Top 0: -39.39,18.78 -39.43,18.77
  Bottom 0: -11.09,100.72 -11.09,100.39
S$343
  Top 0: -39.43,18.77 -40.42,18.77
  Bottom 0: -11.09,100.39 -11.46,99.75
S$344
  Top 0: -40.42,18.77 -40.47,18.78
  Bottom 0: -11.46,99.75 -11.47,99.74
S$345
  Top 0: -40.47,18.78 -40.99,19.3
  Bottom 0: -11.47,99.74 -11.49,99.72
S$346
  Top 0: -40.99,19.3 -41.01,19.35
  Bottom 0: -11.49,99.72 -11.5,99.6
S$347
  Top 0: -41.01,19.35 -41.01,21.37
  Bottom 0: -11.5,99.6 -11.48,99.55
S$348
  Top 0: -41.01,21.37 -40.99,21.42
  Bottom 0: -11.48,99.55 -11.39,99.46
S$349
  Top 0: -40.99,21.42 -40.77,21.63
  Bottom 0: -11.39,99.46 -11.37,99.41
S$350
  Top 0: -40.77,21.63 -40.73,21.65
  Bottom 0: -11.37,99.41 -11.37,98.48
S$351
  Top 0: -40.73,21.65 -40.19,21.65
  Bottom 0: -11.37,98.48 -11.39,98.43
S$352
  Top 0: -40.19,21.65 -40.16,21.64
  Bottom 0: -11.39,98.43 -11.4,98.43
S$353
  Top 0: -41.16,77.73 -41.38,77.96
  Bottom 0: -11.4,98.43 -11.41,98.36
S$354
  Top 0: -41.38,77.96 -41.4,78
  Bottom 0: -11.41,98.36 -11.4,98.34
S$355
  Top 0: -41.4,78 -41.4,81.34
  Bottom 0: -11.4,98.34 -11.37,98.32
S$356
  Top 0: -41.4,81.34 -41.39,81.37
  Bottom 0: -11.37,98.32 -11.21,98.32
S$357
  Top 0: -41.39,81.37 -41.38,81.38
  Bottom 0: -11.21,98.32 -11.16,98.3
S$358
  Top 0: -41.38,81.38 -41.38,83.58
  Bottom 0: -11.16,98.3 -9.91,97.05
S$359
  Top 0: -41.38,83.58 -41.36,83.62
  Bottom 0: -9.91,97.05 -9.89,97
S$360
  Top 0: -41.36,83.62 -40.4,84.59
  Bottom 0: -9.89,97 -9.89,93.78
S$361
  Top 0: -40.4,84.59 -40.38,84.64
  Bottom 0: -9.89,93.78 -9.86,93.73
S$362
  Top 0: -40.38,84.64 -40.38,89.19
  Bottom 0: -9.86,93.73 -9.86,93.14
S$363
  Top 0: -40.38,89.19 -40.36,89.24
  Bottom 0: -9.86,93.14 -9.89,93.08
S$364
  Top 0: -40.36,89.24 -39.92,89.68
  Bottom 0: -9.89,93.08 -9.89,91.85
S$365
  Top 0: -39.92,89.68 -39.87,89.7
  Bottom 0: -9.89,91.85 -9.87,91.81
S$366
  Top 0: -39.87,89.7 -39.86,89.7
  Bottom 0: -9.87,91.81 -9.87,91.28
S$367
  Top 0: -39.86,89.7 -39.82,89.74
  Bottom 0: -9.87,91.28 -9.89,91.23
S$368
  Top 0: -39.82,89.74 -39.82,89.75
  Bottom 0: -9.89,91.23 -9.89,90.14
S$369
  Top 0: -39.82,89.75 -39.8,89.79
  Bottom 0: -9.89,90.14 -9.89,90.12
S$370
  Top 0: -39.8,89.79 -39.8,89.8
  Bottom 0: -9.89,90.12 -9.89,89.88
S$371
  Top 0: -39.8,89.8 -39.79,89.82
  Bottom 0: -9.89,89.88 -9.89,89.87
S$372
  Top 0: -39.79,89.82 -39.79,90.89
  Bottom 0: -9.89,89.87 -9.89,88.86
S$373
  Top 0: -39.79,90.89 -39.77,90.93
  Bottom 0: -9.89,88.86 -9.87,88.82
S$374
  Top 0: -39.77,90.93 -39.76,90.94
  Bottom 0: -9.87,88.82 -5.58,84.53
S$375
  Top 0: -39.76,90.94 -39.74,90.95
  Bottom 0: -5.58,84.53 -5.55,84.52
S$376
  Top 0: -39.74,90.95 -39.17,90.95
  Bottom 0: -5.55,84.52 -5.54,84.52
S$377
  Top 0: -39.17,90.95 -39.13,90.93
  Bottom 0: -5.54,84.52 -5.11,83.47
S$378
  Top 0: -39.13,90.93 -39.09,90.9
  Bottom 0: -5.11,83.47 -5.13,83.42
S$379
  Top 0: -39.09,90.9 -39.08,90.85
  Bottom 0: -5.13,83.42 -5.13,81.52
S$380
  Top 0: -39.08,90.85 -39.08,89.84
  Bottom 0: -5.13,81.52 -5.11,81.46
S$381
  Top 0: -39.08,89.84 -39.06,89.79
  Bottom 0: -5.11,81.46 -5.11,80.48
S$382
  Top 0: -39.06,89.79 -39.05,89.79
  Bottom 0: -5.11,80.48 -5.13,80.43
S$383
  Top 0: -39.05,89.79 -39.04,89.76
  Bottom 0: -5.13,80.43 -5.13,79.91
S$384
  Top 0: -39.04,89.76 -39.04,89.74
  Bottom 0: -5.13,79.91 -5.07,79.84
S$385
  Top 0: -39.04,89.74 -39,89.7
  Bottom 0: -5.07,79.84 -4.13,79.84
S$386
  Top 0: -39,89.7 -38.99,89.7
  Bottom 0: -4.13,79.84 -4.09,79.86
S$387
  Top 0: -38.99,89.7 -38.94,89.68
  Bottom 0: -4.09,79.86 -3.22,80.73
S$388
  Top 0: -38.94,89.68 -38.91,89.65
  Bottom 0: -3.22,80.73 -3.21,80.76
S$389
  Top 0: -38.91,89.65 -38.87,89.63
  Bottom 0: -3.21,80.76 -3.22,80.78
S$390
  Top 0: -38.87,89.63 -35.89,89.63
  Bottom 0: -3.22,80.78 -2.86,80.42
S$391
  Top 0: -35.89,89.63 -35.85,89.65
  Bottom 0: -2.86,80.42 -2.88,80.43
S$392
  Top 0: -35.85,89.65 -35.81,89.68
  Bottom 0: -2.88,80.43 -2.92,80.42
S$393
  Top 0: -35.81,89.68 -35.77,89.7
  Bottom 0: -2.92,80.42 -3.91,79.43
S$394
  Top 0: -35.77,89.7 -35.75,89.72
  Bottom 0: -3.91,79.43 -3.95,79.41
S$395
  Top 0: -35.75,89.72 -35.75,89.73
  Bottom 0: -76.94,76.16 -78.58,76.16
S$396
  Top 0: -35.75,89.73 -35.74,89.76
  Bottom 0: -78.58,76.16 -78.62,76.18
S$397
  Top 0: -35.74,89.76 -35.73,89.76
  Bottom 0: -78.62,76.18 -79.03,76.59
S$398
  Top 0: -35.73,89.76 -35.71,89.81
  Bottom 0: -79.03,76.59 -79.05,76.63
S$399
  Top 0: -35.71,89.81 -35.71,90.87
  Bottom 0: -79.05,76.63 -79.05,77.19
S$400
  Top 0: -35.71,90.87 -35.7,90.92
  Bottom 0: -79.05,77.19 -79.11,77.25
S$401
  Top 0: -35.7,90.92 -35.68,90.93
  Bottom 0: -79.11,77.25 -79.22,77.25
S$402
  Top 0: -35.68,90.93 -35.63,90.95
  Bottom 0: -79.22,77.25 -79.22,78.73
S$403
  Top 0: -35.63,90.95 -35.05,90.95
  Bottom 0: -79.22,78.73 -78.89,78.73
S$404
  Top 0: -35.05,90.95 -35.01,90.93
  Bottom 0: -78.89,78.73 -78.25,78.36
S$405
  Top 0: -35.01,90.93 -35,90.93
  Bottom 0: -78.25,78.36 -78.24,78.35
S$406
  Top 0: -35,90.93 -34.99,90.9
  Bottom 0: -78.24,78.35 -78.22,78.33
S$407
  Top 0: -34.99,90.9 -34.99,89.04
  Bottom 0: -78.22,78.33 -78.1,78.32
S$408
  Top 0: -34.99,89.04 -35.01,89
  Bottom 0: -78.1,78.32 -78.05,78.34
S$409
  Top 0: -35.01,89 -35.96,88.05
  Bottom 0: -78.05,78.34 -77.96,78.43
S$410
  Top 0: -35.96,88.05 -35.98,88.01
  Bottom 0: -77.96,78.43 -77.91,78.45
S$411
  Top 0: -35.98,88.01 -35.98,82.7
  Bottom 0: -77.91,78.45 -76.98,78.45
S$412
  Top 0: -35.98,82.7 -35.96,82.66
  Bottom 0: -76.98,78.45 -76.93,78.43
S$413
  Top 0: -35.96,82.66 -35.24,81.94
  Bottom 0: -76.93,78.43 -76.55,78.04
S$414
  Top 0: -35.24,81.94 -35.19,81.92
  Bottom 0: -76.55,78.04 -76.53,78
S$415
  Top 0: -35.19,81.92 -30.6,81.92
  Bottom 0: -76.53,78 -76.53,77.82
S$416
  Top 0: -30.6,81.92 -30.55,81.9
  Bottom 0: -76.53,77.82 -76.46,77.75
S$417
  Top 0: -30.55,81.9 -30.43,81.78
  Bottom 0: -76.46,77.75 -67.36,77.75
S$418
  Top 0: -30.43,81.78 -30.41,81.73
  Bottom 0: -67.36,77.75 -67.31,77.77
S$419
  Top 0: -30.41,81.73 -30.41,80.46
  Bottom 0: -67.31,77.77 -62.52,82.56
S$420
  Top 0: -30.41,80.46 -30.39,80.42
  Bottom 0: -62.52,82.56 -62.51,82.63
S$421
  Top 0: -30.39,80.42 -30.3,80.33
  Bottom 0: -62.51,82.63 -62.52,82.65
S$422
  Top 0: -30.3,80.33 -30.26,80.31
  Bottom 0: -62.52,82.65 -62.55,82.67
S$423
  Top 0: -30.26,80.31 -27.85,80.31
  Bottom 0: -62.55,82.67 -71.79,82.67
S$424
  Top 0: -27.85,80.31 -27.81,80.33
  Bottom 0: -71.79,82.67 -71.84,82.69
S$425
  Top 0: -27.81,80.33 -27.66,80.47
  Bottom 0: -71.84,82.69 -72.91,83.76
S$426
  Top 0: -27.66,80.47 -27.64,80.52
  Bottom 0: -72.91,83.76 -72.92,83.8
S$427
  Top 0: -27.64,80.52 -27.64,81.8
  Bottom 0: -72.92,83.8 -72.92,86.15
S$428
  Top 0: -27.64,81.8 -27.62,81.85
  Bottom 0: -72.92,86.15 -72.96,86.21
S$429
  Top 0: -27.62,81.85 -27.48,81.98
  Bottom 0: -72.96,86.21 -73.09,86.26
S$430
  Top 0: -27.48,81.98 -27.44,82
  Bottom 0: -73.09,86.26 -73.12,86.26
S$431
  Top 0: -27.44,82 -22.78,82
  Bottom 0: -73.12,86.26 -73.14,86.25
S$432
  Top 0: -22.78,82 -22.74,81.98
  Bottom 0: -73.14,86.25 -72.59,87.09
S$433
  Top 0: -22.74,81.98 -22.62,81.87
  Bottom 0: -72.59,87.09 -72.59,87.07
S$434
  Top 0: -22.62,81.87 -22.6,81.83
  Bottom 0: -72.59,87.07 -72.58,87.03
S$435
  Top 0: -22.6,81.83 -22.6,78.26
  Bottom 0: -72.58,87.03 -72.46,86.95
S$436
  Top 0: -22.6,78.26 -22.62,78.22
  Bottom 0: -72.46,86.95 -72.38,86.96
S$437
  Top 0: -22.62,78.22 -23.11,77.73
  Bottom 0: -72.38,86.96 -72.32,87.01
S$438
  Top 0: -23.11,77.73 -23.15,77.71
  Bottom 0: -72.32,87.01 -72.31,87.06
S$439
  Top 0: -23.15,77.71 -41.11,77.71
  Bottom 0: -72.31,87.06 -72.31,100.19
S$440
  Top 0: -41.11,77.71 -41.16,77.73
  Bottom 0: -72.31,100.19 -72.32,100.24
S$441
  Top 0: -34.68,89.92 -34.74,89.99
  Bottom 0: -72.32,100.24 -73.02,100.94
S$442
  Top 0: -34.74,89.99 -34.76,90.03
  Bottom 0: -73.02,100.94 -73.04,100.98
S$443
  Top 0: -34.76,90.03 -34.76,91
  Bottom 0: -73.04,100.98 -73.04,103
S$444
  Top 0: -34.76,91 -34.76,91.01
  Bottom 0: -73.04,103 -73.02,103.05
S$445
  Top 0: -34.76,91.01 -34.76,91.03
  Bottom 0: -73.02,103.05 -72.58,103.49
S$446
  Top 0: -34.76,91.03 -34.78,91.08
  Bottom 0: -72.58,103.49 -72.53,103.51
S$447
  Top 0: -34.78,91.08 -34.79,91.08
  Bottom 0: -72.53,103.51 -65.74,103.51
S$448
  Top 0: -34.79,91.08 -34.8,91.11
  Bottom 0: -65.74,103.51 -65.69,103.49
S$449
  Top 0: -34.8,91.11 -34.8,91.12
  Bottom 0: -65.69,103.49 -60.49,98.29
S$450
  Top 0: -34.8,91.12
  Bottom 0: -60.49,98.29 -60.44,98.27
S$451
  Top 0: -34.8,91.12 -34.84,91.14
  Bottom 0: -60.44,98.27 -60.32,98.29
S$452
  Top 0: -34.84,91.14 -34.9,91.2
  Bottom 0: -60.32,98.29 -60.29,98.31
S$453
  Top 0: -34.9,91.2 -34.95,91.22
  Bottom 0: -60.29,98.31 -60.29,98.32
S$454
  Top 0: -34.95,91.22 -35.77,91.22
  Bottom 0: -60.29,98.32 -59.97,98.52
S$455
  Top 0: -35.77,91.22 -35.81,91.2
  Bottom 0: -59.97,98.52 -59.96,98.52
S$456
  Top 0: -35.81,91.2 -35.88,91.13
  Bottom 0: -59.96,98.52 -59.94,98.53
S$457
  Top 0: -35.88,91.13 -35.91,91.12
  Bottom 0: -59.94,98.53 -59.83,98.63
S$458
  Top 0: -35.91,91.12
  Bottom 0: -59.83,98.63 -59.82,98.66
S$459
  Top 0: -35.91,91.12 -35.91,91.11
  Bottom 0: -59.82,98.66 -59.82,98.67
S$460
  Top 0: -35.91,91.11 -35.92,91.09
  Bottom 0: -59.82,98.67 -59.82,98.75
S$461
  Top 0: -35.92,91.09 -35.93,91.08
  Bottom 0: -59.82,98.75 -59.82,98.77
S$462
  Top 0: -35.93,91.08 -35.95,91.03
  Bottom 0: -59.82,98.77 -59.83,98.8
S$463
  Top 0: -35.95,91.03 -35.95,90.02
  Bottom 0: -59.83,98.8 -59.91,98.89
S$464
  Top 0: -35.95,90.02 -35.97,89.97
  Bottom 0: -59.91,98.89 -59.94,98.9
S$465
  Top 0: -35.97,89.97 -36.02,89.92
  Bottom 0: -59.94,98.9 -59.95,98.9
S$466
  Top 0: -36.02,89.92 -36.06,89.91
  Bottom 0: -59.95,98.9 -59.61,99.2
S$467
  Top 0: -36.06,89.91 -36.7,89.91
  Bottom 0: -59.61,99.2 -59.62,99.19
S$468
  Top 0: -36.7,89.91 -36.74,89.92
  Bottom 0: -59.62,99.19 -59.61,99.16
S$469
  Top 0: -36.74,89.92 -36.93,90.11
  Bottom 0: -59.61,99.16 -59.52,99.06
S$470
  Top 0: -36.93,90.11 -36.95,90.15
  Bottom 0: -59.52,99.06 -59.5,99.05
S$471
  Top 0: -36.95,90.15 -36.95,90.91
  Bottom 0: -59.5,99.05 -59.48,99.05
S$472
  Top 0: -36.95,90.91 -36.96,90.96
  Bottom 0: -59.48,99.05 -59.12,98.74
S$473
  Top 0: -36.96,90.96 -37.24,91.23
  Bottom 0: -59.12,98.74 -59.11,98.71
S$474
  Top 0: -37.24,91.23 -37.28,91.25
  Bottom 0: -59.11,98.71 -59.08,98.68
S$475
  Top 0: -37.28,91.25 -39.77,91.25
  Bottom 0: -59.08,98.68 -58.76,98.68
S$476
  Top 0: -39.77,91.25 -39.82,91.27
  Bottom 0: -58.76,98.68 -58.72,98.66
S$477
  Top 0: -39.82,91.27 -39.99,91.44
  Bottom 0: -58.72,98.66 -55.34,95.29
S$478
  Top 0: -39.99,91.44 -40.01,91.48
  Bottom 0: -55.34,95.29 -55.3,95.27
S$479
  Top 0: -40.01,91.48 -40.01,92.16
  Bottom 0: -55.3,95.27 -54.78,95.27
S$480
  Top 0: -40.01,92.16 -39.99,92.21
  Bottom 0: -54.78,95.27 -54.73,95.29
S$481
  Top 0: -39.99,92.21 -39.92,92.28
  Bottom 0: -54.73,95.29 -54.73,94.81
S$482
  Top 0: -39.92,92.28 -39.87,92.3
  Bottom 0: -54.73,94.81 -54.78,94.83
S$483
  Top 0: -39.87,92.3 -39.86,92.3
  Bottom 0: -54.78,94.83 -55.01,94.83
S$484
  Top 0: -39.86,92.3 -39.82,92.34
  Bottom 0: -55.01,94.83 -55.07,94.77
S$485
  Top 0: -39.82,92.34 -39.82,92.35
  Bottom 0: -55.07,94.77 -55.07,94.01
S$486
  Top 0: -39.82,92.35 -39.8,92.4
  Bottom 0: -55.07,94.01 -55.01,93.94
S$487
  Top 0: -39.8,92.4
  Bottom 0: -55.01,93.94 -51.7,93.94
S$488
  Top 0: -39.8,92.4 -39.78,92.43
  Bottom 0: -51.7,93.94 -51.66,93.92
S$489
  Top 0: -39.78,92.43 -39.78,93.48
  Bottom 0: -51.66,93.92 -50.22,92.49
S$490
  Top 0: -39.78,93.48 -39.77,93.52
  Bottom 0: -50.22,92.49 -50.18,92.47
S$491
  Top 0: -39.77,93.52 -39.76,93.53
  Bottom 0: -50.18,92.47 -39.65,92.47
S$492
  Top 0: -39.76,93.53 -39.72,93.55
  Bottom 0: -39.65,92.47 -39.59,92.47
S$493
  Top 0: -39.72,93.55 -39.14,93.55
  Bottom 0: -39.59,92.47 -39.59,92.46
S$494
  Top 0: -39.14,93.55 -39.1,93.53
  Bottom 0: -39.59,92.46 -38.79,92.46
S$495
  Top 0: -39.1,93.53
  Bottom 0: -38.79,92.46 -38.79,91.14
S$496
  Top 0: -39.1,93.53 -39.08,93.48
  Bottom 0: -38.79,91.14 -39.92,91.14
S$497
  Top 0: -39.08,93.48 -39.08,92.47
  Bottom 0: -39.92,91.14 -39.93,91.15
S$498
  Top 0: -39.08,92.47 -39.06,92.43
  Bottom 0: -39.93,91.15 -50.73,91.15
S$499
  Top 0: -39.06,92.43 -39.06,92.42
  Bottom 0: -50.73,91.15 -50.77,91.17
S$500
  Top 0: -39.06,92.42 -39.04,92.38
  Bottom 0: -50.77,91.17 -52.21,92.6
S$501
  Top 0: -39.04,92.38 -39.04,92.36
  Bottom 0: -52.21,92.6 -52.25,92.62
S$502
  Top 0: -39.04,92.36 -38.98,92.3
  Bottom 0: -52.25,92.62 -55.17,92.62
S$503
  Top 0: -38.98,92.3 -38.95,92.3
  Bottom 0: -55.17,92.62 -55.22,92.6
S$504
  Top 0: -38.95,92.3 -38.92,92.29
  Bottom 0: -55.22,92.6 -60.97,86.85
S$505
  Top 0: -38.92,92.29
  Bottom 0: -60.97,86.85 -60.99,86.81
S$506
  Top 0: -38.92,92.29 -34.21,92.29
  Bottom 0: -60.99,86.81 -60.99,82.26
S$507
  Top 0: -34.21,92.29 -34.17,92.27
  Bottom 0: -60.99,82.26 -61.01,82.21
S$508
  Top 0: -34.17,92.27 -33.87,91.97
  Bottom 0: -61.01,82.21 -66.76,76.45
S$509
  Top 0: -33.87,91.97 -33.85,91.93
  Bottom 0: -66.76,76.45 -66.81,76.43
S$510
  Top 0: -33.85,91.93 -33.85,90.09
  Bottom 0: -66.81,76.43 -76.62,76.43
S$511
  Top 0: -33.85,90.09 -33.87,90.04
  Bottom 0: -76.62,76.43 -76.66,76.42
S$512
  Top 0: -33.87,90.04 -33.99,89.92
  Bottom 0: -76.66,76.42 -76.9,76.18
S$513
  Top 0: -33.99,89.92 -34.04,89.9
  Bottom 0: -76.9,76.18 -76.94,76.16
S$514
  Top 0: -34.04,89.9 -34.63,89.9
  Bottom 0: -23.55,2 -23.55,1.99
S$515
  Top 0: -34.63,89.9 -34.68,89.92
  Bottom 0: -23.55,1.99 -24.04,1.61
S$516
  Top 0: -40.99,92.47 -41.12,92.6
  Bottom 0: -24.04,1.61 -24.05,1.61
S$517
  Top 0: -41.12,92.6 -41.14,92.65
  Bottom 0: -24.05,1.61 -48.56,1.61
S$518
  Top 0: -41.14,92.65 -41.14,94.27
  Bottom 0: -48.56,1.61 -48.6,1.63
S$519
  Top 0: -41.14,94.27 -41.12,94.32
  Bottom 0: -48.6,1.63 -49.69,2.72
S$520
  Top 0: -41.12,94.32 -40.45,94.99
  Bottom 0: -49.69,2.72 -49.73,2.73
S$521
  Top 0: -40.45,94.99 -40.41,95.01
  Bottom 0: -49.73,2.73 -49.75,2.72
S$522
  Top 0: -40.41,95.01 -38.49,95.01
  Bottom 0: -49.75,2.72 -50.71,2.81
S$523
  Top 0: -38.49,95.01 -38.45,94.99
  Bottom 0: -50.71,2.81 -50.74,2.82
S$524
  Top 0: -38.45,94.99 -37.64,94.18
  Bottom 0: -50.74,2.82 -52.1,2.82
S$525
  Top 0: -37.64,94.18 -37.62,94.14
  Bottom 0: -52.1,2.82 -52.13,2.81
S$526
  Top 0: -37.62,94.14 -37.62,92.83
  Bottom 0: -52.13,2.81 -53.25,2.81
S$527
  Top 0: -37.62,92.83 -37.64,92.78
  Bottom 0: -53.25,2.81 -53.28,2.82
S$528
  Top 0: -37.64,92.78 -37.91,92.51
  Bottom 0: -53.28,2.82 -54.64,2.82
S$529
  Top 0: -37.91,92.51 -37.96,92.5
  Bottom 0: -54.64,2.82 -54.67,2.81
S$530
  Top 0: -37.96,92.5 -38.72,92.5
  Bottom 0: -54.67,2.81 -55.79,2.81
S$531
  Top 0: -38.72,92.5 -38.77,92.51
  Bottom 0: -55.79,2.81 -55.82,2.82
S$532
  Top 0: -38.77,92.51 -38.81,92.56
  Bottom 0: -55.82,2.82 -57.18,2.82
S$533
  Top 0: -38.81,92.56 -38.83,92.61
  Bottom 0: -57.18,2.82 -57.21,2.81
S$534
  Top 0: -38.83,92.61 -38.83,93.59
  Bottom 0: -57.21,2.81 -58.33,2.81
S$535
  Top 0: -38.83,93.59 -38.85,93.64
  Bottom 0: -58.33,2.81 -58.36,2.82
S$536
  Top 0: -38.85,93.64
  Bottom 0: -58.36,2.82 -59.72,2.82
S$537
  Top 0: -38.85,93.64 -38.87,93.68
  Bottom 0: -59.72,2.82 -59.75,2.81
S$538
  Top 0: -38.87,93.68 -38.87,93.69
  Bottom 0: -59.75,2.81 -60.87,2.81
S$539
  Top 0: -38.87,93.69 -38.91,93.72
  Bottom 0: -60.87,2.81 -60.9,2.82
S$540
  Top 0: -38.91,93.72
  Bottom 0: -60.9,2.82 -62.26,2.82
S$541
  Top 0: -38.91,93.72 -38.96,93.74
  Bottom 0: -62.26,2.82 -62.29,2.81
S$542
  Top 0: -38.96,93.74 -38.98,93.76
  Bottom 0: -62.29,2.81 -63.84,3.69
S$543
  Top 0: -38.98,93.76 -39.02,93.78
  Bottom 0: -63.84,3.69 -63.84,3.7
S$544
  Top 0: -39.02,93.78 -39.81,93.78
  Bottom 0: -63.84,3.7 -63.85,3.72
S$545
  Top 0: -39.81,93.78 -39.85,93.76
  Bottom 0: -63.85,3.72 -67.83,7.71
S$546
  Top 0: -39.85,93.76 -39.88,93.74
  Bottom 0: -67.83,7.71 -67.86,7.72
S$547
  Top 0: -39.88,93.74 -39.92,93.72
  Bottom 0: -67.86,7.72 -67.87,7.72
S$548
  Top 0: -39.92,93.72 -39.93,93.72
  Bottom 0: -67.87,7.72 -68.76,9.25
S$549
  Top 0: -39.93,93.72 -39.99,93.66
  Bottom 0: -68.76,9.25 -68.75,9.28
S$550
  Top 0: -39.99,93.66 -39.99,93.65
  Bottom 0: -68.75,9.28 -68.75,10.68
S$551
  Top 0: -39.99,93.65 -40.01,93.61
  Bottom 0: -68.75,10.68 -68.76,10.71
S$552
  Top 0: -40.01,93.61 -40.02,93.6
  Bottom 0: -68.76,10.71 -68.76,11.79
S$553
  Top 0: -40.02,93.6 -40.03,93.58
  Bottom 0: -68.76,11.79 -68.76,11.8
S$554
  Top 0: -40.03,93.58 -40.03,92.59
  Bottom 0: -68.76,11.8 -68.75,11.81
S$555
  Top 0: -40.03,92.59 -40.05,92.55
  Bottom 0: -68.75,11.81 -68.75,12.21
S$556
  Top 0: -40.05,92.55 -40.12,92.47
  Bottom 0: -68.75,12.21 -68.81,12.28
S$557
  Top 0: -40.12,92.47 -40.16,92.45
  Bottom 0: -68.81,12.28 -70.03,12.28
S$558
  Top 0: -40.16,92.45 -40.95,92.45
  Bottom 0: -70.03,12.28 -70.07,12.26
S$559
  Top 0: -40.95,92.45 -40.99,92.47
  Bottom 0: -70.07,12.26 -71.93,10.4
S$560
  Top 0: -37.24,92.52 -37.42,92.69
  Bottom 0: -71.93,10.4 -71.98,10.38
S$561
  Top 0: -37.42,92.69 -37.42,93.82
  Bottom 0: -71.98,10.38 -72.26,10.38
S$562
  Top 0: -37.42,93.82 -37.4,93.86
  Bottom 0: -72.26,10.38 -72.31,10.36
S$563
  Top 0: -37.4,93.86 -37.23,94.03
  Bottom 0: -72.31,10.36 -72.31,10.83
S$564
  Top 0: -37.23,94.03 -37.19,94.05
  Bottom 0: -72.31,10.83 -72.26,10.81
S$565
  Top 0: -37.19,94.05 -36.51,94.05
  Bottom 0: -72.26,10.81 -72.16,10.81
S$566
  Top 0: -36.51,94.05 -36.47,94.03
  Bottom 0: -72.16,10.81 -72.11,10.83
S$567
  Top 0: -36.47,94.03 -35.97,93.53
  Bottom 0: -72.11,10.83 -70.25,12.69
S$568
  Top 0: -35.97,93.53 -35.95,93.49
  Bottom 0: -70.25,12.69 -70.2,12.71
S$569
  Top 0: -35.95,93.49 -35.95,92.67
  Bottom 0: -70.2,12.71 -68.81,12.71
S$570
  Top 0: -35.95,92.67 -35.97,92.62
  Bottom 0: -68.81,12.71 -68.75,12.77
S$571
  Top 0: -35.97,92.62 -36.08,92.52
  Bottom 0: -68.75,12.77 -68.75,13.22
S$572
  Top 0: -36.08,92.52 -36.12,92.5
  Bottom 0: -68.75,13.22 -68.76,13.25
S$573
  Top 0: -36.12,92.5 -37.2,92.5
  Bottom 0: -68.76,13.25 -68.76,14.33
S$574
  Top 0: -37.2,92.5 -37.24,92.52
  Bottom 0: -68.76,14.33 -68.76,14.34
S$575
  Top 0: -35.62,92.51 -35.7,92.59
  Bottom 0: -68.76,14.34 -68.75,14.35
S$576
  Top 0: -35.7,92.59 -35.71,92.63
  Bottom 0: -68.75,14.35 -68.75,14.78
S$577
  Top 0: -35.71,92.63 -35.71,93.62
  Bottom 0: -68.75,14.78 -68.81,14.84
S$578
  Top 0: -35.71,93.62 -35.73,93.67
  Bottom 0: -68.81,14.84 -70.48,14.84
S$579
  Top 0: -35.73,93.67 -35.74,93.67
  Bottom 0: -70.48,14.84 -70.52,14.82
S$580
  Top 0: -35.74,93.67 -35.75,93.69
  Bottom 0: -70.52,14.82 -72.21,13.14
S$581
  Top 0: -35.75,93.69 -35.77,93.72
  Bottom 0: -72.21,13.14 -72.22,13.11
S$582
  Top 0: -35.77,93.72 -35.79,93.72
  Bottom 0: -72.22,13.11 -72.22,13.1
S$583
  Top 0: -35.79,93.72 -36.01,93.94
  Bottom 0: -72.22,13.1 -72.52,13.47
S$584
  Top 0: -36.01,93.94 -36.03,93.99
  Bottom 0: -72.52,13.47 -72.51,13.47
S$585
  Top 0: -36.03,93.99 -36.03,94.67
  Bottom 0: -72.51,13.47 -72.48,13.48
S$586
  Top 0: -36.03,94.67 -36.01,94.71
  Bottom 0: -72.48,13.48 -70.7,15.25
S$587
  Top 0: -36.01,94.71 -35.8,94.92
  Bottom 0: -70.7,15.25 -70.66,15.27
S$588
  Top 0: -35.8,94.92 -35.75,94.94
  Bottom 0: -70.66,15.27 -68.81,15.27
S$589
  Top 0: -35.75,94.94 -34.9,94.94
  Bottom 0: -68.81,15.27 -68.75,15.33
S$590
  Top 0: -34.9,94.94 -34.86,94.92
  Bottom 0: -68.75,15.33 -68.75,15.76
S$591
  Top 0: -34.86,94.92 -34.78,94.85
  Bottom 0: -68.75,15.76 -68.76,15.79
S$592
  Top 0: -34.78,94.85 -34.76,94.8
  Bottom 0: -68.76,15.79 -68.76,16.87
S$593
  Top 0: -34.76,94.8 -34.76,94.04
  Bottom 0: -68.76,16.87 -68.75,16.9
S$594
  Top 0: -34.76,94.04 -34.78,94
  Bottom 0: -68.75,16.9 -68.75,17.33
S$595
  Top 0: -34.78,94 -34.98,93.8
  Bottom 0: -68.75,17.33 -68.81,17.39
S$596
  Top 0: -34.98,93.8 -35,93.75
  Bottom 0: -68.81,17.39 -73.48,17.39
S$597
  Top 0: -35,93.75 -35,92.61
  Bottom 0: -73.48,17.39 -73.51,17.36
S$598
  Top 0: -35,92.61 -35.02,92.56
  Bottom 0: -73.51,17.36 -73.52,17.34
S$599
  Top 0: -35.02,92.56 -35.07,92.51
  Bottom 0: -73.52,17.34 -73.85,17.77
S$600
  Top 0: -35.07,92.51 -35.11,92.5
  Bottom 0: -73.85,17.77 -73.83,17.76
S$601
  Top 0: -35.11,92.5 -35.58,92.5
  Bottom 0: -73.83,17.76 -73.81,17.77
S$602
  Top 0: -35.58,92.5 -35.62,92.51
  Bottom 0: -73.81,17.77 -73.78,17.8
S$603
  Top 0: -34.76,92.64 -34.76,93.49
  Bottom 0: -73.78,17.8 -73.73,17.82
S$604
  Top 0: -34.76,93.49 -34.74,93.54
  Bottom 0: -73.73,17.82 -68.81,17.82
S$605
  Top 0: -34.74,93.54 -34.33,93.95
  Bottom 0: -68.81,17.82 -68.75,17.89
S$606
  Top 0: -34.33,93.95 -34.29,93.97
  Bottom 0: -68.75,17.89 -68.75,18.31
S$607
  Top 0: -34.29,93.97 -33.42,93.97
  Bottom 0: -68.75,18.31 -68.76,18.32
S$608
  Top 0: -33.42,93.97 -33.37,93.95
  Bottom 0: -68.76,18.32 -68.76,18.33
S$609
  Top 0: -33.37,93.95 -33.19,93.77
  Bottom 0: -68.76,18.33 -68.76,19.41
S$610
  Top 0: -33.19,93.77 -33.17,93.72
  Bottom 0: -68.76,19.41 -68.75,19.44
S$611
  Top 0: -33.17,93.72 -33.17,92.7
  Bottom 0: -68.75,19.44 -68.75,19.87
S$612
  Top 0: -33.17,92.7 -33.19,92.66
  Bottom 0: -68.75,19.87 -68.81,19.93
S$613
  Top 0: -33.19,92.66 -33.33,92.52
  Bottom 0: -68.81,19.93 -73.49,19.93
S$614
  Top 0: -33.33,92.52 -33.38,92.5
  Bottom 0: -73.49,19.93 -73.53,19.91
S$615
  Top 0: -33.38,92.5 -34.62,92.5
  Bottom 0: -73.53,19.91 -73.53,19.89
S$616
  Top 0: -34.62,92.5 -34.66,92.52
  Bottom 0: -73.53,19.89 -73.85,20.36
S$617
  Top 0: -34.66,92.52 -34.74,92.6
  Bottom 0: -73.85,20.36 -73.84,20.36
S$618
  Top 0: -34.74,92.6 -34.76,92.64
  Bottom 0: -73.84,20.36 -73.81,20.37
S$619
  Top 0: -22.79,85.6 -22.94,85.45
  Bottom 0: -73.81,20.37
S$620
  Top 0: -22.94,85.45 -22.98,85.43
  Bottom 0: -73.81,20.37 -68.81,20.37
S$621
  Top 0: -22.98,85.43 -26.75,85.43
  Bottom 0: -68.81,20.37 -68.75,20.43
S$622
  Top 0: -26.75,85.43 -26.8,85.45
  Bottom 0: -68.75,20.43 -68.75,20.85
S$623
  Top 0: -26.8,85.45 -27.19,85.83
  Bottom 0: -68.75,20.85 -68.76,20.86
S$624
  Top 0: -27.19,85.83 -27.23,85.85
  Bottom 0: -68.76,20.86 -68.76,20.87
S$625
  Top 0: -27.23,85.85 -28.52,85.85
  Bottom 0: -68.76,20.87 -68.76,21.95
S$626
  Top 0: -28.52,85.85 -28.57,85.87
  Bottom 0: -68.76,21.95 -68.75,21.97
S$627
  Top 0: -28.57,85.87 -28.79,86.09
  Bottom 0: -68.75,21.97 -68.75,22.01
S$628
  Top 0: -28.79,86.09 -28.8,86.13
  Bottom 0: -68.75,22.01 -74.16,27.41
S$629
  Top 0: -28.8,86.13 -28.8,87.95
  Bottom 0: -74.16,27.41 -74.2,27.43
S$630
  Top 0: -28.8,87.95 -28.79,87.99
  Bottom 0: -74.2,27.43 -74.61,27.43
S$631
  Top 0: -28.79,87.99 -28.46,88.32
  Bottom 0: -74.61,27.43 -74.66,27.45
S$632
  Top 0: -28.46,88.32 -28.41,88.34
  Bottom 0: -74.66,27.45 -77.02,29.81
S$633
  Top 0: -28.41,88.34 -24.62,88.34
  Bottom 0: -77.02,29.81 -77.03,29.82
S$634